# Altium PCB gecko3main-tester.PcbDoc
Units mm, origin at the board's own origin, x right, y up, seen from the top; angles counter-clockwise.
Board outline 134.62 x 99.31 mm, 2 copper layers (Top Layer, Bottom Layer), stack 1.671 mm thick; 38 components, 127 nets, 369 pads, 27 vias.
Unrouted connection lines stored in the file: 2.
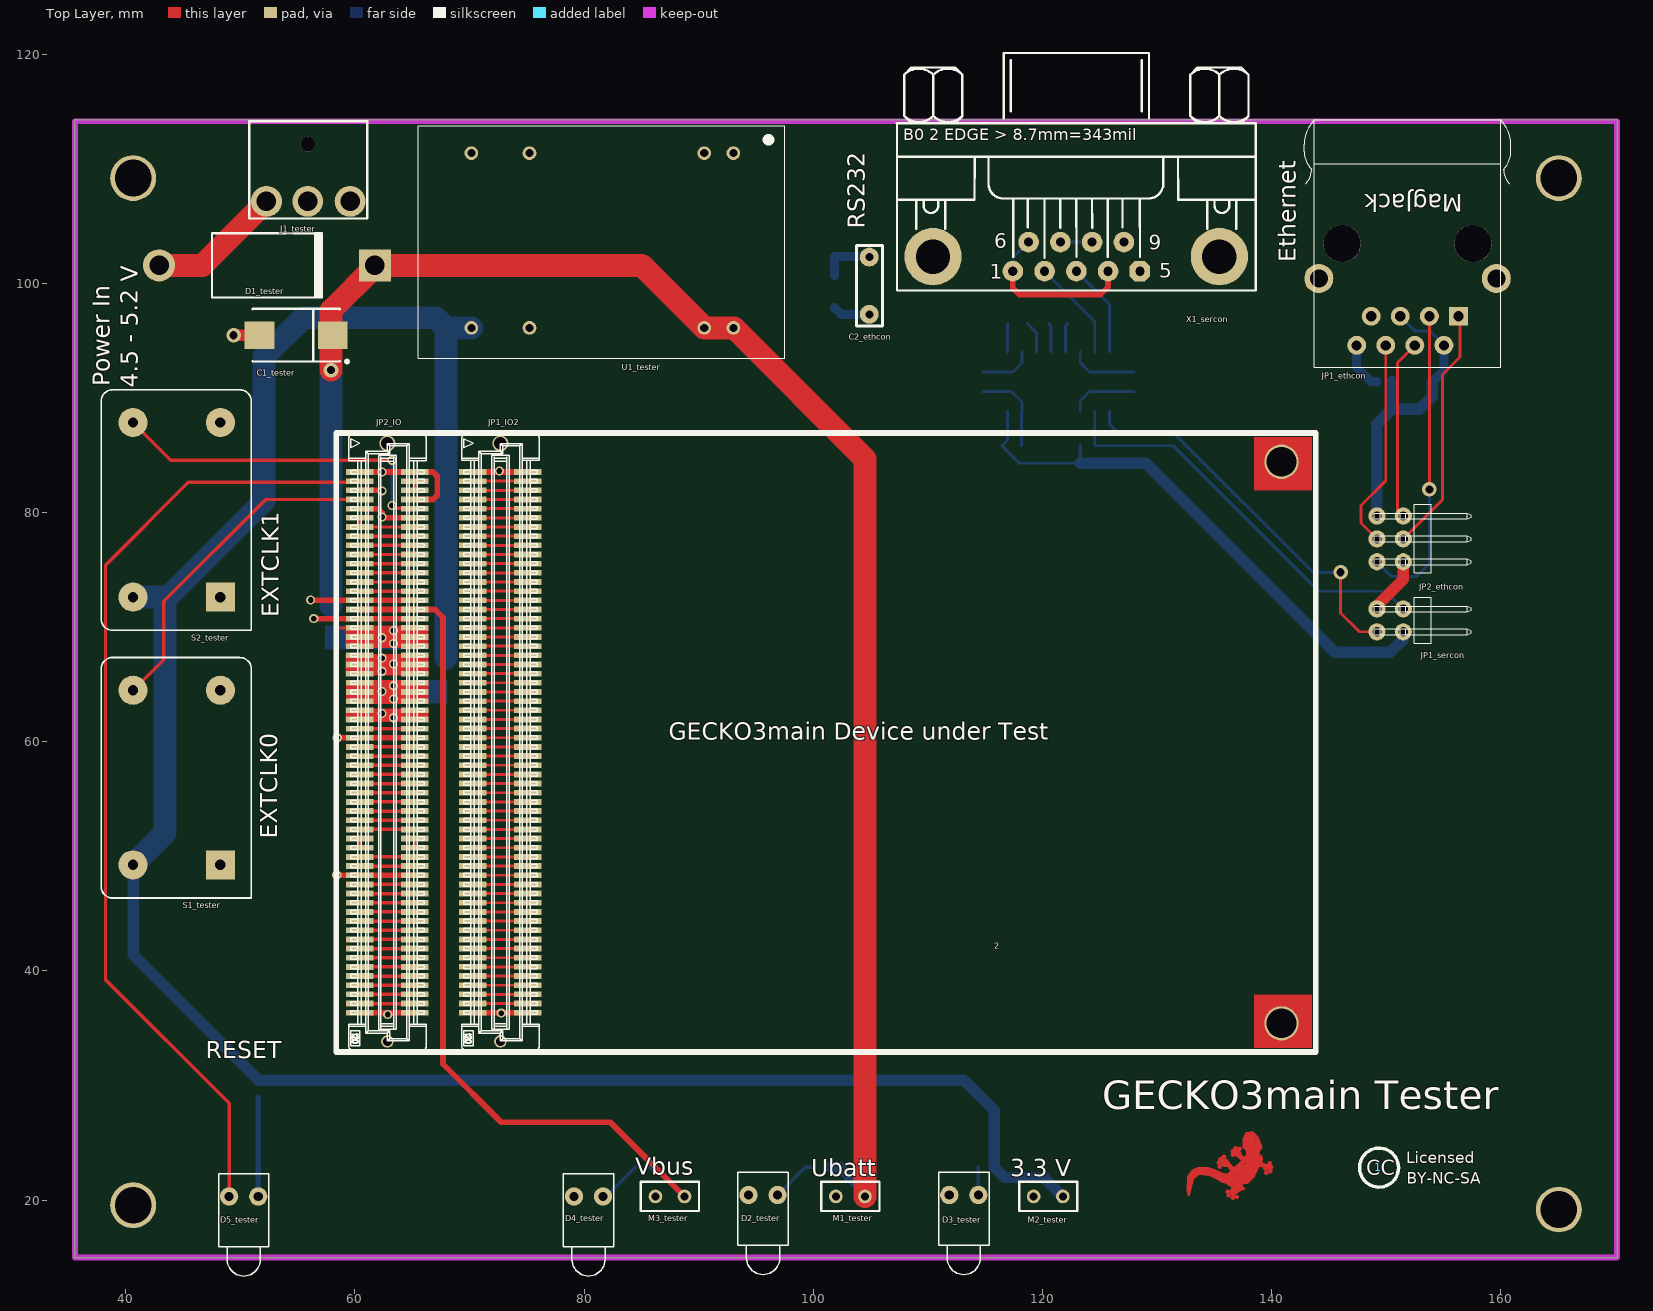
[diagram p0: Top Layer view]
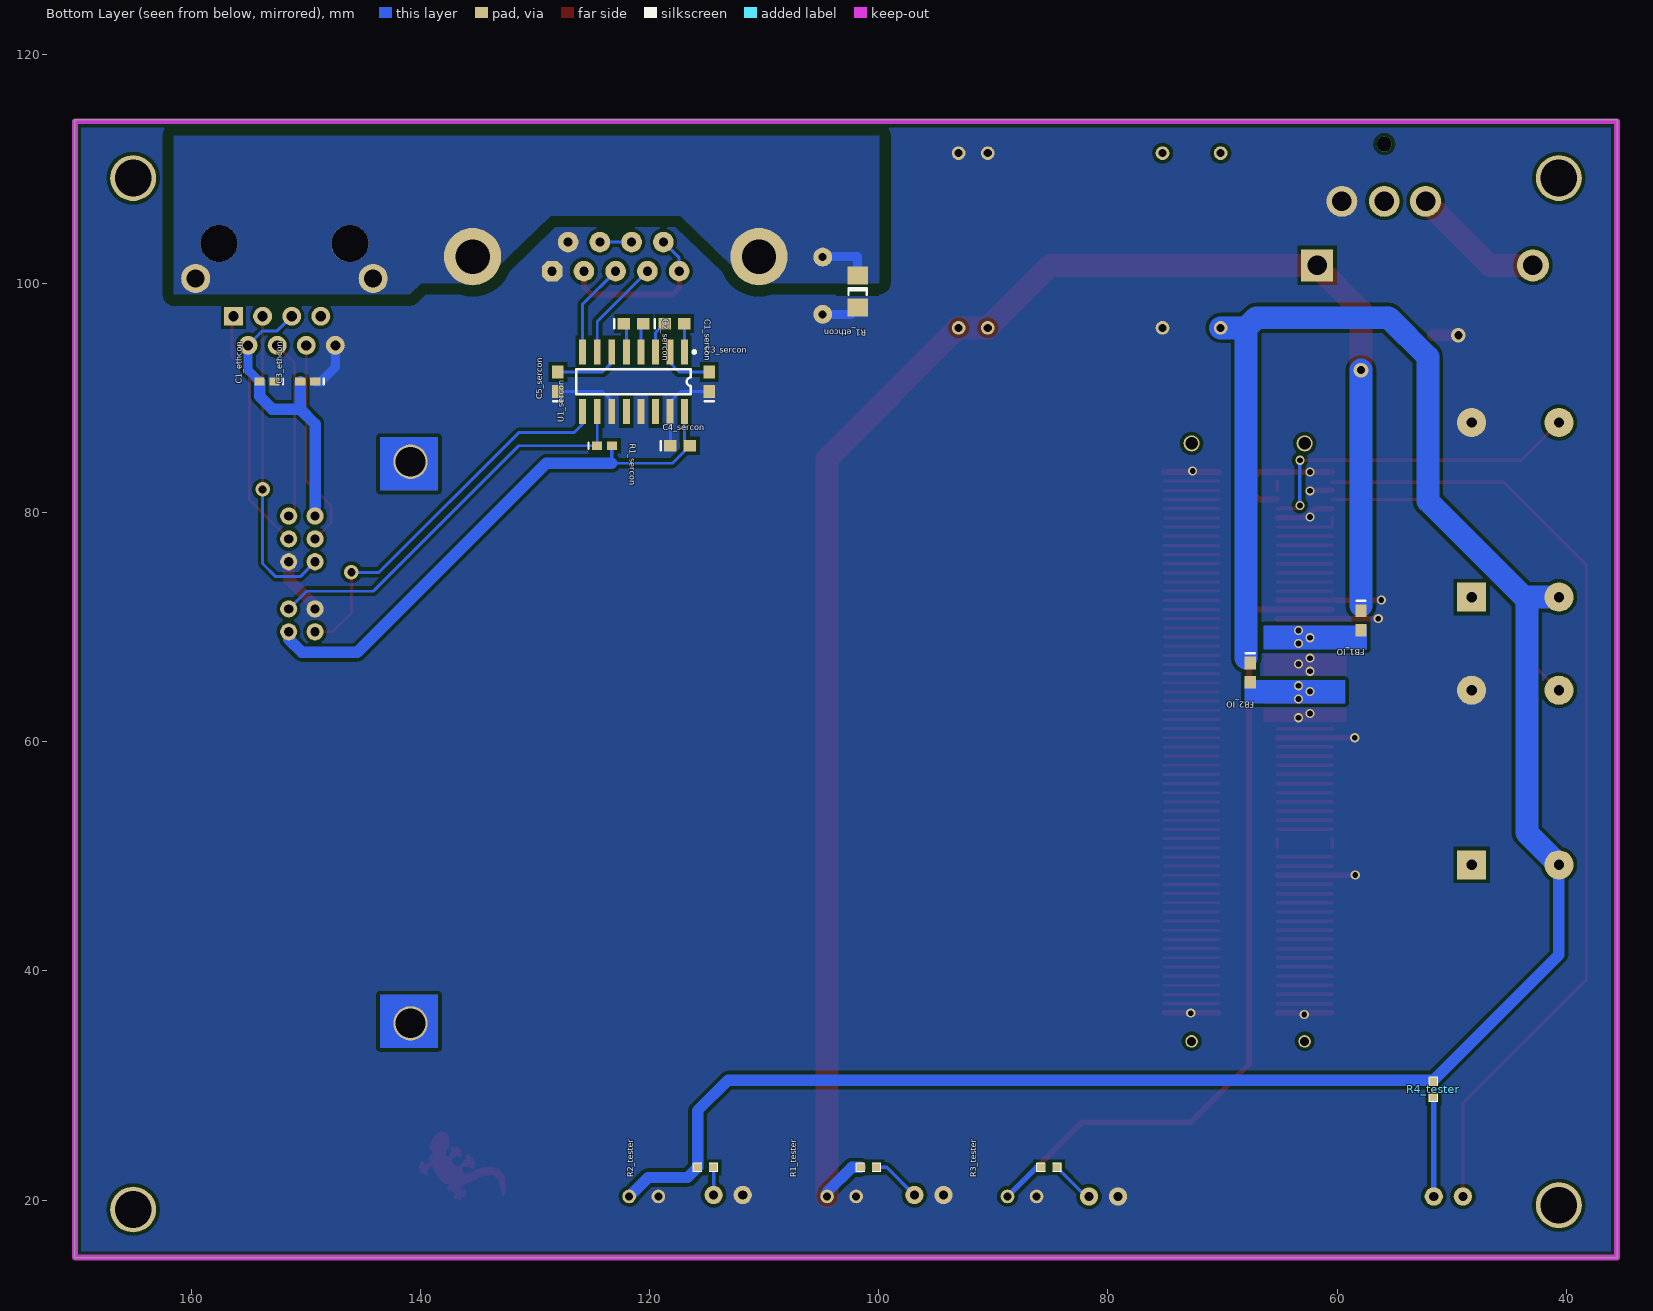
[diagram p1: Bottom Layer view, seen from below]

## Layer stack, top to bottom
Top Layer: signal copper 0.0356
Dielectric: core 1.6, FR-4, Dk 4.8
Bottom Layer: signal copper 0.0356

## Board outline
35.56,14.986 35.56,114.3 170.18,114.3 170.18,14.986

## Design rules (kind name [scope] priority, off if disabled: settings)
Clearance Clearance_earth [InNet('EARTH')] p1: gap=1
Clearance [All] p2: gap=0.3
ComponentClearance [All] p1: gap=0.254 collisioncheckmode=3 verticalgap=0.254
HoleSize [All] p1: absolutevalues=TRUE maxlimit=5 minlimit=0.025 maxpercent=80.000 minpercent=20.000
PolygonConnect [All] p1: connectstyle=Direct reliefconductorwidth=0.254 reliefentries=4 polygonreliefangle="90 Angle"
RoomDefinition gecko3main-tester [InComponentClass('gecko3main-tester')] p1: confinementstyle=ConfineIn formatcopy=TRUE lockcomponents=FALSE outline 132.334,19.685 160.02,19.685 160.02,26.289 132.334,26.289
RoomDefinition io-bus [InComponentClass('io-bus')] p2: confinementstyle=ConfineIn formatcopy=TRUE lockcomponents=FALSE outline 57.023,32.639 68.453,32.639 68.453,87.249 57.023,87.249
RoomDefinition tester [InComponentClass('tester')] p3: confinementstyle=ConfineIn formatcopy=TRUE lockcomponents=FALSE outline 37.465,12.954 123.444,12.954 123.444,114.554 37.465,114.554
RoomDefinition serial-con [InComponentClass('serial-con')] p4: confinementstyle=ConfineIn formatcopy=TRUE lockcomponents=FALSE outline 106.934,68.199 157.861,68.199 157.861,120.523 106.934,120.523
RoomDefinition ethernet-connector [InComponentClass('ethernet-connector')] p5: confinementstyle=ConfineIn formatcopy=TRUE lockcomponents=FALSE outline 100.584,74.422 161.29,74.422 161.29,114.681 100.584,114.681
RoomDefinition io-bus2 [InComponentClass('io-bus2')] p6: confinementstyle=ConfineIn formatcopy=TRUE lockcomponents=FALSE outline 68.786,32.697 68.786,87.371 76.614,87.371 76.614,32.697 76.214,32.697 76.214,32.547 69.186,32.547 69.186,32.697
RoutingVias [All] p1: holewidth=0.711 width=1.27 viastyle="Through Hole" minholewidth=0.5 minwidth=0.8 maxholewidth=5 maxwidth=7
SolderMaskExpansion [All] p1: expansion=0.102
TestPointUsage [All] p1: valid=0 allowmultiple=FALSE
Testpoint [All] p1: side=15 testpointundercomponent=TRUE minsize=1.016 maxsize=2.54 preferedsize=1.524 minholesize=0 maxholesize=1.016 preferedholesize=0.813 testpointgrid=0.025 style=1023 order=0-112345678
Width [All] p1: maxlimit=5 minlimit=0.254 preferedwidth=0.254 minimp=50.000000 maximp=50.000000 favimp=50.000000
17 further rules are at their usual default settings.

## Classes and differential pairs
component class tester: C1_tester D1_tester D2_tester D3_tester D4_tester D5_tester J1_tester M1_tester M2_tester M3_tester R1_tester R2_tester R3_tester R4_tester S1_tester S2_tester U1_tester
component class serial-con: 1_sercon C1_sercon C2_sercon C3_sercon C4_sercon C5_sercon JP1_sercon R1_sercon U1 U1_sercon X1 X1_sercon
component class io-bus: C2_IO FB1_IO FB2_IO JP1_IO JP2_IO R1_IO R2_IO
component class io-bus2: JP1_IO2 JP2_IO2
component class ethernet-connector: 1_ethcon C1_ethcon C2_ethcon C3_ethcon JP1_ethcon JP2_ethcon R1_ethcon
net class ENCODER[0..7]: ENCODER0 ENCODER1 ENCODER2 ENCODER3 ENCODER4 ENCODER5 ENCODER6 ENCODER7
net class GPIO1_[0..51]: GPIO1_1 GPIO1_4 GPIO1_6 GPIO1_8 GPIO1_10 GPIO1_12 GPIO1_14 GPIO1_16 GPIO1_18 GPIO1_19 GPIO1_21 GPIO1_23 GPIO1_25 GPIO1_27 GPIO1_29 GPIO1_31 GPIO1_33 GPIO1_35 GPIO1_37 GPIO1_39 GPIO1_41 GPIO1_43 GPIO1_45 GPIO1_47 GPIO1_49 GPIO1_51
net class GPIO2_[0..115]: GPIO2_1 GPIO2_3 GPIO2_5 GPIO2_7 GPIO2_9 GPIO2_11 GPIO2_13 GPIO2_15 GPIO2_17 GPIO2_19 GPIO2_21 GPIO2_23 GPIO2_25 GPIO2_27 GPIO2_29 GPIO2_31 GPIO2_33 GPIO2_35 GPIO2_37 GPIO2_39 GPIO2_41 GPIO2_43 GPIO2_45 GPIO2_47 GPIO2_49 GPIO2_51 GPIO2_53 GPIO2_55 GPIO2_57 GPIO2_59 GPIO2_61 GPIO2_63 GPIO2_65 GPIO2_67 GPIO2_69 GPIO2_71 GPIO2_73 GPIO2_75 GPIO2_77 GPIO2_79 GPIO2_81 GPIO2_83 GPIO2_85 GPIO2_87 GPIO2_89 GPIO2_91 GPIO2_93 GPIO2_95 GPIO2_97 GPIO2_99 GPIO2_101 GPIO2_103 GPIO2_105 GPIO2_107 GPIO2_109 GPIO2_111 GPIO2_113 GPIO2_115
component class gecko3main-tester: 1 2

## Components (designator, comment, footprint, x,y, rotation, side; value= is the part's Value field where it differs from the comment)
1 "CC License" CC-License 149.352,22.86 r0 top
2 "" GECKO3 137.16,22.352 r0 top
C1_ethcon "Cap" 0402 153.416,91.44 r0 bottom
C1_sercon "Cap" 0603#1 117.856,96.52 r180 bottom
C1_tester "Cap Pol3" D 54.864,95.504 r180 top
C2_ethcon "C" c-r5 104.902,99.822 r270 top
C2_sercon "Cap" 0603#1 121.412,96.52 r180 bottom
C3_ethcon "Cap" 0402 149.86,91.44 r0 bottom
C3_sercon "Cap" 0603#1 114.808,91.44 r90 bottom
C4_sercon "Cap" 0603#1 117.348,85.852 r180 bottom
C5_sercon "Cap" 0603#1 128.016,91.44 r90 bottom
D1_tester "Diode SB340" DO-201AD 52.324,101.6 r0 top
D2_tester "Green" LED-1 95.631,20.447 r270 top
D3_tester "Green" LED-1 113.157,20.447 r270 top
D4_tester "Green" LED-1 80.391,20.32 r270 top
D5_tester "Red" LED-1 50.292,20.32 r270 top
FB1_IO "FERRITE-BEAD" 0603#1 57.912,70.612 r270 bottom
FB2_IO "FERRITE-BEAD" 0603#1 67.564,66.04 r270 bottom
J1_tester "Mini Power Jack" "Mini power Jack" 55.88,107.188 r90 top
JP1_ethcon "SI-10021" SI-10021 151.892,99.06 r180 top
JP1_IO2 "AMP-FH-120-RECEPTABLE-H9-H13" amp_FH_.8mm_120pin_r_H9_H13 72.7,59.959 r270 top
JP1_sercon "M22-2040205" M22-2040205 150.368,70.612 r270 top
JP2_ethcon "M22-2540305" M22-2540305 150.368,77.724 r270 top
JP2_IO "AMP-FH-120-RECEPTABLE-H9-H13" amp_FH_.8mm_120pin_r_H9_H13 62.832,59.958 r270 top
M1_tester "Meter" RAD-0.1 103.251,20.32 r0 top
M2_tester "Meter" RAD-0.1 120.523,20.32 r0 top
M3_tester "Meter" RAD-0.1 87.503,20.32 r180 top
R1_ethcon "Res2" CC3216-1206 101.854,99.314 r270 bottom
R1_sercon "Res2" 0402 123.952,85.852 r180 bottom
R1_tester "Res2" 0603#2 100.203,22.86 r0 bottom
R2_tester "Res2" 0603#2 114.427,22.86 r0 bottom
R3_tester "Res2" 0603#2 84.455,22.86 r0 bottom
R4_tester "Res2" 0603#2 51.57,28.956 r90 bottom
S1_tester "#NAME?" IQXO-350 48.26,49.276 r180 top
S2_tester "#NAME?" IQXO-350 48.26,72.644 r180 top
U1_sercon "MAX3232CSE" SO-G16 121.412,91.44 r0 bottom
U1_tester "TRACO-TEL5" TRACO-TEL5 97.536,113.792 r0 top
X1_sercon "DB9/F" DSUB9RA/F 128.524,101.092 r0 top

## Footprints (in the part's own frame and the unit in brackets; to place one, negate y for a bottom-side part, rotate by r counter-clockwise, add the part's x,y. Pads: shape width x height; smd on the part's side, far side on the other; paste and mask are expansions set on the pad)
0402 [mm] "Chip Capacitor; Body 1.0 x 0.5 mm (LxW typ)"
  rect 0.9x0.7 smd: 1(-0.65,0) 2(0.65,0)
  silkscreen extent -1.4,-0.25 -1.4,0.25
0603#1 [mm] "Chip Capacitor; Body 1.6 x 0.8 mm (LxW typ)"
  rect 1.1x1 smd: 1(-0.85,0) 2(0.85,0)
  silkscreen extent -1.7,-0.4 -1.7,0.4
0603#2 [mm]
  rect 0.762x0.762 smd: 1(0.003,0.008) 2(1.4,0.008)
  silkscreen extent -0.37,-0.37 1.78,0.38
amp_FH_.8mm_120pin_r_H9_H13 [mm] "AMP Free Height System, 0.8mm, 120 Pin, 9 or 13mm Heigth, Receptacle"
  round 1.4 hole 1.1 paste-0.05 mask+0.06: 0(-26.1,0)
  round 1.1 hole 0.8 paste-0.05 mask+0.06: 0(26.1,0)
  rect 0.5x2.4 smd paste-0.05 mask+0.06: 1(-23.6,-2.4) 2(-23.6,2.4) 3(-22.8,-2.4) 4(-22.8,2.4) 5(-22,-2.4) 6(-22,2.4) 7(-21.2,-2.4) 8(-21.2,2.4) 9(-20.4,-2.4) 10(-20.4,2.4) 11(-19.6,-2.4) 12(-19.6,2.4) 13(-18.8,-2.4) 14(-18.8,2.4) 15(-18,-2.4) 16(-18,2.4) 17(-17.2,-2.4) 18(-17.2,2.4) 19(-16.4,-2.4) 20(-16.4,2.4) 21(-15.6,-2.4) 22(-15.6,2.4) 23(-14.8,-2.4) 24(-14.8,2.4) 25(-14,-2.4) 26(-14,2.4) 27(-13.2,-2.4) 28(-13.2,2.4) 29(-12.4,-2.4) 30(-12.4,2.4) 31(-11.6,-2.4) 32(-11.6,2.4) 33(-10.8,-2.4) 34(-10.8,2.4) 35(-10,-2.4) 36(-10,2.4) 37(-9.2,-2.4) 38(-9.2,2.4) 39(-8.4,-2.4) 40(-8.4,2.4) 41(-7.6,-2.4) 42(-7.6,2.4) 43(-6.8,-2.4) 44(-6.8,2.4) 45(-6,-2.4) 46(-6,2.4) 47(-5.2,-2.4) 48(-5.2,2.4) 49(-4.4,-2.4) 50(-4.4,2.4) 51(-3.6,-2.4) 52(-3.6,2.4) 53(-2.8,-2.4) 54(-2.8,2.4) 55(-2,-2.4) 56(-2,2.4) 57(-1.2,-2.4) 58(-1.2,2.4) 59(-0.4,-2.4) 60(-0.4,2.4) 61(0.4,-2.4) 62(0.4,2.4) 63(1.2,-2.4) 64(1.2,2.4) 65(2,-2.4) 66(2,2.4) 67(2.8,-2.4) 68(2.8,2.4) 69(3.6,-2.4) 70(3.6,2.4) 71(4.4,-2.4) 72(4.4,2.4) 73(5.2,-2.4) 74(5.2,2.4) 75(6,-2.4) 76(6,2.4) 77(6.8,-2.4) 78(6.8,2.4) 79(7.6,-2.4) 80(7.6,2.4) 81(8.4,-2.4) 82(8.4,2.4) 83(9.2,-2.4) 84(9.2,2.4) 85(10,-2.4) 86(10,2.4) 87(10.8,-2.4) 88(10.8,2.4) 89(11.6,-2.4) 90(11.6,2.4) 91(12.4,-2.4) 92(12.4,2.4) 93(13.2,-2.4) 94(13.2,2.4) 95(14,-2.4) 96(14,2.4) 97(14.8,-2.4) 98(14.8,2.4) 99(15.6,-2.4) 100(15.6,2.4) 101(16.4,-2.4) 102(16.4,2.4) 103(17.2,-2.4) 104(17.2,2.4) 105(18,-2.4) 106(18,2.4) 107(18.8,-2.4) 108(18.8,2.4) 109(19.6,-2.4) 110(19.6,2.4) 111(20.4,-2.4) 112(20.4,2.4) 113(21.2,-2.4) 114(21.2,2.4) 115(22,-2.4) 116(22,2.4) 117(22.8,-2.4) 118(22.8,2.4) 119(23.6,-2.4) 120(23.6,2.4)
  silkscreen extent -26.91,-3.39 26.89,3.41
c-r5 [mil] "Condensator spacing 5mm"
  round 65 hole 27.56: 1(-98.43,0) 2(98.43,0)
  silkscreen extent -138,-44 138,45
CC3216-1206 [mm] "Chip Capacitor; Body 3.2 x 1.6 mm (LxW typ)"
  rect 1.6x1.8 smd: 1(-1.4,0) 2(1.4,0)
  silkscreen extent -0.3,-0.8 0.3,0.8
CC-License [mm]
  silkscreen extent -1.65,-1.73 1.75,1.68
D [mm] "Capacitor, SM Tantalum; Body 7.3 x 4.3 mm (LxW typ)"
  rect 2.6x2.4 smd: 1(-3.2,0) 2(3.2,0)
  silkscreen extent -4.58,-2.3 3.8,2.42
DO-201AD [mm] "Diode, Axial; Body 9.5 x 5.6 mm (LxDia. max), Lead Dia. 1.32 mm (max)"
  round 2.8 hole 1.7: 1(-9.42,0)
  rect 2.8x2.8 hole 1.7: 2(9.42,0)
  silkscreen extent -4.8,-2.8 4.9,2.8
DSUB9RA/F [mm] "DB9 female connector"
  round 1.8 hole 0.8: 1(-11.091,0) 2(-8.318,0) 3(-5.546,0) 4(-2.773,0) 6(-9.715,2.54) 7(-6.943,2.54) 8(-4.17,2.54) 9(-1.397,2.54)
  oct 1.8x1.8 hole 0.8: 5(0,0)
  round 5 hole 3: ""(-18.055,1.27) ""(6.943,1.27)
  silkscreen extent -21.21,-1.69 10.12,19.05
GECKO3 [mm] "Gecko Logo"
  Top Layer lines w0.254: -4.293,-0.418 -4.293,-0.457 -4.275,-0.9 ; -3.773,0.102 -2.464,0.102 ; -2.134,-0.025 -2.261,0.102 -2.464,0.102 ; -2.083,-0.025 -1.829,-0.025 -1.422,-0.432 ; -1.778,-0.102 -1.778,-0.025 ; -1.524,-0.203 -1.905,-0.203 -2.337,-0.203 ; -1.443,0.895 -0.935,0.895 -0.858,0.818 -0.741,0.667 -0.752,0.647 -1.036,0.666 -1.341,0.666 -1.443,0.768 -1.443,0.996 -1.316,1.123 -1.098,1.123 -0.938,0.963 ; -1.422,-0.686 -1.422,-0.076 ; -1.422,-0.381 -1.473,-0.432 -1.93,-0.432 ; -1.42,-0.101 -0.666,-0.151 ; -1.295,-0.584 -1.295,-0.15 ; -1.17,-0.127 -1.17,-0.635 -1.041,-0.838 -0.666,-0.151 ; -0.995,-0.685 -0.995,-0.177 ; -0.85,0.625 -0.743,0.392 -0.633,0.309 ; -0.838,-0.66 -0.888,-0.076 -0.393,0.418 ; -0.735,0.665 -0.448,0.377 ; -0.6,0.45 -0.588,0.447 ; -0.584,-0.66 -0.356,-0.889 0,-0.889 0.025,-0.864 0.025,-0.838 0.152,-0.711 0.61,-0.711 1.245,-0.001 1.245,0.255 1.778,0.713 ; -0.584,0 -0.584,-0.203 -0.152,0.229 0.178,0.229 0.229,0.178 0.276,0.225 0.479,0.225 0.94,0.686 ; -0.562,0.495 -0.526,0.284 ; -0.508,0.102 -0.279,0.102 -0.305,0.127 ; -0.441,0.291 0.333,1.065 ; -0.381,-1.6 -0.381,-1.549 -0.152,-1.321 ; -0.381,-1.118 0.127,-1.118 -0.076,-1.321 -0.152,-1.321 ; -0.347,0.426 -0.305,0.254 ; -0.3,0.457 0.406,0.457 ; -0.233,0.513 -0.152,0.457 0.025,0.457 0.508,0.94 0.508,1.143 ; -0.215,0.432 -0.666,-0.151 ; -0.175,1.55 -0.149,1.526 ; -0.102,1.499 -0.229,1.626 -0.229,1.829 -0.152,1.905 -0.102,1.905 -0.07,1.841 -0.041,1.857 -0.02,1.815 -0.075,1.65 ; -0.03,1.835 0.06,1.805 ; -0.016,1.461 0.109,1.345 0.097,1.347 0.179,1.271 ; 0.003,1.768 0.069,1.714 0.1,1.651 ; 0.067,1.811 0.104,1.724 0.075,1.65 ; 0.1,1.6 0.303,1.397 0.506,1.322 0.785,1.551 0.735,1.854 0.685,2.09 0.432,2.268 0.432,2.692 0.432,2.997 0.686,3.48 1.168,3.556 1.651,3.073 1.93,2.235 1.861,2.095 1.815,2.08 1.706,1.861 1.696,1.841 1.626,1.701 1.93,1.448 2.007,1.219 1.899,0.896 1.904,0.89 2.261,0.711 2.361,0.611 ; 0.178,0.457 0.178,0.432 0.813,0.432 ; 0.2,1.25 0.325,1.125 0.323,1.125 0.406,1.041 0.508,1.143 ; 0.25,1.25 0.222,1.311 0.254,1.397 ; 0.254,1.27 0.33,1.346 0.406,1.27 0.461,1.325 1.075,1.325 1.075,2.506 1.067,2.515 ; 0.33,-0.432 -0.279,-0.432 -0.076,-0.229 0.825,-0.229 ; 0.508,1.168 0.508,1.143 ; 0.635,-0.229 0.432,-0.432 0.432,-0.457 0.178,-0.711 0.178,-1.321 -0.025,-1.524 ; 0.686,0.432 0.94,0.686 ; 0.737,0.787 0.737,2.032 0.635,2.134 0.635,3.073 0.889,3.327 1.067,3.327 ; 0.889,3.023 0.991,3.023 ; 0.991,0.635 1.321,0.635 ; 0.996,3.129 0.838,2.972 0.838,2.261 0.94,2.159 0.94,0.686 ; 1.067,3.099 1.067,3.327 ; 1.125,0.675 1.125,1.856 ; 1.194,0.508 1.067,0.508 0.686,0.127 0.686,0 ; 1.219,2.515 1.067,2.515 ; 1.524,2.489 1.524,0.737 1.016,0.229 1.016,0 0.356,-0.66 -0.254,-0.66 -0.381,-0.533 -0.381,-0.33 -0.051,0 0.686,0 ; 1.702,2.235 1.626,2.311 1.626,2.769 1.067,3.327 ; 1.702,2.475 1.702,2.032 1.524,1.854 1.524,1.626 1.524,1.499 1.778,1.245 ; 2.261,0.508 1.778,0.711 1.575,0.356 1.273,-0.295 0.737,-0.801 0.33,-0.914 0.203,-1.041 0.203,-1.118 0.432,-1.346 -0.025,-1.524 ; 2.275,0.522 2.294,0.542 2.304,0.542 2.314,0.532 2.323,0.542 2.333,0.542 2.333,0.581 2.353,0.6 ; 2.337,0.584 2.337,0.635 ; -2.464,0.102 -2.667,0.305 -3.531,0.305 -3.327,0.102 -2.667,0.102 -2.54,-0.025 -1.778,-0.025 ; -2.337,-0.203 -2.743,-0.102 -3.48,-0.025 -4.039,-0.508 -4.369,-1.88 -4.42,-1.473 -4.394,-0.33 -4.013,0.203 -3.556,0.432 -3.302,0.457 -2.667,0.432 -2.134,0.229 -1.422,-0.076 ; -2.337,-0.203 -1.93,-0.432 ; -1.93,-0.432 -1.448,-0.711 -0.991,-0.889 -0.483,-1.245 -0.152,-1.092 -0.533,-1.346 -0.686,-1.549 -0.61,-1.829 ; -1.778,-0.025 -1.422,-0.076 ; -0.61,-1.829 -0.61,-1.778 -0.152,-1.321 ; -0.61,-1.829 -0.33,-1.829 -0.025,-1.524 ; 0.686,0 1.321,0.635 ; 1.067,2.515 0.838,2.743 1.247,2.743 1.321,2.669 1.321,0.635
  Top Layer lines w0.3: -0.838,-0.66 -0.381,-1.118 ; -0.584,-0.66 -0.584,-0.1 ; 0.406,0.457 0.737,0.787 ; 0.991,3.023 1.524,2.489 ; 1.778,0.713 1.778,1.245
  Top Layer lines w0.34: 2.15,0.675 2.5,0.65 ; 2.217,0.526 2.325,0.4 ; 2.336,0.375 2.4,0.375 2.475,0.45 ; 2.475,0.4 2.5,0.5 2.5,0.625
  Top Layer lines w0.381: -1.775,0.9 -1.75,0.9 ; -1.675,0.55 -1.65,0.55 ; -1.625,1.225 -1.6,1.225 ; -1.3,1.425 -1.275,1.425 ; -0.991,-1.626 -0.966,-1.626 ; -0.889,-1.956 -0.864,-1.956 ; -0.533,-2.134 -0.508,-2.134 ; -0.525,1.6 -0.5,1.6 ; -0.525,1.925 -0.5,1.925 ; -0.3,2.175 -0.275,2.175 ; -0.177,-2.082 -0.152,-2.082 ; 0.075,2.125 0.1,2.125 ; 2.375,0.05 2.4,0.05 ; 2.7,0.85 2.725,0.85 ; 2.725,0.175 2.75,0.175 ; 2.825,0.5 2.85,0.5
  Top Layer lines w0.4: -4.293,-0.418 -3.773,0.102
IQXO-350 [mm]
  rect 2.54x2.54 hole 0.9: 1(0.006,0.008)
  round 2.54 hole 0.9: 7(0.006,-15.232) 8(7.626,-15.232) 14(7.626,0.008)
  silkscreen extent -2.69,-18.1 10.41,2.91
LED-1 [mm] "Typical RED GaAs LED; 2 Leads"
  round 1.6 hole 0.8: 1(0,1.27) 2(0,-1.27)
  silkscreen extent -2,-2.2 6.95,2.2
M22-2040205 [mm] "Harwin 2mm horizontal connector 2x2 pin"
  round 1.5 hole 0.8: 1(-1,-1.15) 2(-1,1.15) 3(1,-1.15) 4(1,1.15)
  silkscreen extent -2,-1.38 2,7.1
M22-2540305 [mm] "Harwin 2mm horizontal connector 2x3 pin"
  round 1.5 hole 0.8: 1(-2,-1.15) 2(-2,1.15) 3(0,-1.15) 4(0,1.15) 5(2,-1.15) 6(2,1.15)
  silkscreen extent -3,-1.38 2.98,7.1
"Mini power Jack" [mm] "J"
  round 2.7 hole 1.7: 1(0,3.6) 2(0,0) 3(0,-3.7)
  round 1.3 hole 1.3: ""(5,0)
  silkscreen extent -1.5,-5.2 7,5.1
RAD-0.1 [mm] "Indicating Instrument; 2 Leads"
  round 1.2 hole 0.7: 1(-1.27,0) 2(1.27,0)
  silkscreen extent -2.54,-1.27 2.54,1.27
SI-10021 [mil] "MagJack from Bel Stewart, single port RJ45 with magnetics, without LED's"
  round 127.99 hole 127.99: 0(-225,-175) 0(225,-175)
  rect 65x65 hole 35: 1(-175,75)
  round 65 hole 35: 2(-125,175) 3(-75,75) 4(-25,175) 5(25,75) 6(75,175) 7(125,75) 8(175,175)
  round 100 hole 62: s(-305,-55) s(305,-55)
  silkscreen extent -355,-600 355,250
SO-G16 [mm] "Small Outline; 16 Leads; Body Width 3.9 mm; Pitch 1.27 mm"
  rect 0.6x2.2 smd: 1(-4.445,-2.6) 2(-3.175,-2.6) 3(-1.905,-2.6) 4(-0.635,-2.6) 5(0.635,-2.6) 6(1.905,-2.6) 7(3.175,-2.6) 8(4.445,-2.6) 9(4.445,2.6) 10(3.175,2.6) 11(1.905,2.6) 12(0.635,2.6) 13(-0.635,2.6) 14(-1.905,2.6) 15(-3.175,2.6) 16(-4.445,2.6)
  silkscreen extent -5.42,-2.72 5,1.1
TRACO-TEL5 [mm] "DC/DC Converter Serie TEL5 from Traco Power"
  round 1.2 hole 0.7: 2(-4.5,-2.4) 3(-7.04,-2.4) 9(-22.3,-2.4) 11(-27.375,-2.4) 14(-27.375,-17.65) 16(-22.3,-17.65) 22(-7.04,-17.65) 23(-4.5,-17.65)
  silkscreen extent -32,-20.3 0,0

## Part data
2: library part Gecko3, "GECKO3"
C1_ethcon C1_sercon C2_sercon C3_ethcon C3_sercon C4_sercon C5_sercon: "Capacitor"
C1_tester: "Polarized Capacitor (Surface Mount)"
D1_tester: library part "Diode 1N4001", "1 Amp General Purpose Rectifier"
D2_tester D3_tester D4_tester D5_tester: library part LED1, "Typical RED GaAs LED"
J1_tester: library part "MINI POWER JACK"
JP1_ethcon: "MagJack from Bel Stewart, single port RJ45 with magnetics, without LED's"
JP1_IO2 JP2_IO: "AMP Free Height System, 0.8mm, 120 Pin, 9 or 13mm Height, Receptable"
M1_tester M2_tester M3_tester: "Indicating Instrument"
R1_ethcon R1_sercon R1_tester R2_tester R3_tester R4_tester: "Resistor"
S1_tester S2_tester: library part IQXO-350, "Crystal Oscillator"
U1_sercon: "3.0V TO 5.5V, Low-Power, up to 1Mbps, True RS-232 Transceiver Using Four 0.1µF External Capacitor"
U1_tester: "TRACO DC/DC Converter TEL5 Series"

## Free pads (board coordinates)
  round 4 hole 3.2: 0(40.64,109.22) 1(40.64,19.558) 2(165.1,19.177) 3(165.1,109.22)
  round 3 hole 2.6 paste-0.05 mask+0.06: 0(140.882,84.458) 0(140.882,35.433)

## Via types
v1: diameter 0.8, hole 0.5, Top Layer to Bottom Layer, 23 vias
v2: diameter 1.27, hole 0.711, Top Layer to Bottom Layer, 4 vias

## Nets (pads, with @x,y where several pads share a name; then routed paths per layer and width w, separated by ;. In a path a pad name is that pad's centre, name@x,y a point inside that pad or via, vN(x,y) a via of type N, cw(c..) or ccw(c..) an arc to the next point about the centre after c; other vN are vias at no path point)
3.3V: C1_ethcon.2 C3_ethcon.2 C4_sercon.2 FB2_IO.1 JP1_ethcon.2 JP1_ethcon.5 JP1_sercon.4 JP2_ethcon.1 M2_tester.2 R1_sercon.2 R2_tester.2 R4_tester.2 S1_tester.14 S2_tester.14 U1_sercon.16 U1_tester.14 | length 275.4
  Bottom Layer w0.254: U1_sercon.16 116.967,86.321 C4_sercon.2 118.022,84.328 123.317,84.328 ; JP1_ethcon.5 152.527,95.885 153.797,95.885 JP1_ethcon.2
  Bottom Layer w0.3: R1_sercon.2 123.317,85.837 123.317,84.328
  Bottom Layer w0.8: C1_ethcon.2 155.067,92.441 JP1_ethcon.2
  Bottom Layer w1: S1_tester.14 40.634,41.408 51.562,30.48 113.157,30.48 115.824,27.813 115.824,23.495 ; 115.827,23.492 R2_tester.2 116.709,21.971 120.142,21.971 M2_tester.2 ; 123.317,84.328 129.032,84.328 145.542,67.818 150.368,67.818 151.518,68.968 JP1_sercon.4 ; JP2_ethcon.1 149.218,87.75 150.51,89.042 ; C3_ethcon.2 150.51,89.042 ; C1_ethcon.2 154.066,90.17 152.938,89.042 150.51,89.042
  Bottom Layer w2: S1_tester.14 43.434,52.068 43.434,72.644 40.642,72.644 S2_tester.14 ; 43.688,72.644 52.07,81.026 52.07,93.599 55.499,97.028 67.056,97.028 67.942,96.142 U1_tester.14 ; FB2_IO.1@67.945,67.31 67.945,96.142
EARTH: C2_ethcon.1 JP1_ethcon.0 JP1_ethcon.s R1_ethcon.1 X1_sercon. | length 4.7
  Bottom Layer w0.8: R1_ethcon.1 101.854,102.362 104.902,102.362 C2_ethcon.1
ENCODER0: JP2_IO.61 JP2_IO.62 | length 4.8
  Top Layer w0.3: JP2_IO.61 JP2_IO.62
ENCODER1: JP2_IO.63 JP2_IO.64 | length 4.8
  Top Layer w0.3: JP2_IO.63 JP2_IO.64
ENCODER2: JP2_IO.65 JP2_IO.66 | length 4.8
  Top Layer w0.3: JP2_IO.65 JP2_IO.66
ENCODER3: JP2_IO.67 JP2_IO.68 | length 4.8
  Top Layer w0.3: JP2_IO.67 JP2_IO.68
ENCODER4: JP2_IO.69 JP2_IO.70 | length 4.8
  Top Layer w0.3: JP2_IO.69 JP2_IO.70
ENCODER5: JP2_IO.71 JP2_IO.72 | length 4.8
  Top Layer w0.3: JP2_IO.71 JP2_IO.72
ENCODER6: JP2_IO.73 JP2_IO.74 | length 4.8
  Top Layer w0.3: JP2_IO.73 JP2_IO.74
ENCODER7: JP2_IO.75 JP2_IO.76 | length 4.8
  Top Layer w0.3: JP2_IO.75 JP2_IO.76
EXTCLK0: JP2_IO.7 S1_tester.8 | length 29.7
  Top Layer w0.3: S1_tester.8 43.307,67.181 43.307,72.263 52.202,81.158 JP2_IO.7
EXTCLK1: JP2_IO.10 S2_tester.8 | length 30
  Top Layer w0.3: S2_tester.8 43.928,84.582 v1(63.246,84.582) ; v1(63.246,80.645) 63.5,80.391 65.199,80.391 JP2_IO.10
  Bottom Layer w0.3: v1(63.246,80.645) v1(63.246,84.582)
GND: C1_ethcon.1 C1_tester.2 C2_ethcon.2 C3_ethcon.1 C3_sercon.1 C4_sercon.1 C5_sercon.1 D2_tester.2 D3_tester.2 D4_tester.2 J1_tester.3 JP1_ethcon.8 JP1_IO2.1 JP1_IO2.2 JP1_IO2.119 JP1_IO2.120 JP1_sercon.1 JP2_ethcon.6 JP2_IO.1 JP2_IO.2 JP2_IO.5 JP2_IO.8 JP2_IO.9 JP2_IO.12 JP2_IO.29 JP2_IO.30 JP2_IO.33 JP2_IO.34 JP2_IO.41 JP2_IO.42 JP2_IO.43 JP2_IO.44 JP2_IO.45 JP2_IO.46 JP2_IO.53 JP2_IO.54 JP2_IO.55 JP2_IO.56 JP2_IO.59 JP2_IO.60 JP2_IO.89 JP2_IO.90 JP2_IO.119 JP2_IO.120 M1_tester.1 M2_tester.1 M3_tester.2 R1_ethcon.2 S1_tester.7 S2_tester.7 U1_sercon.11 U1_sercon.13 U1_sercon.15 U1_tester.2 U1_tester.3 U1_tester.16 X1_sercon.5 X1_sercon.9 | length 92.9
  Top Layer w0.5: v1@56.134,72.358 JP2_IO.30 ; v1@56.388,70.739 v1(56.407,70.758) JP2_IO.34 ; v1(58.42,48.387) 58.449,48.358 JP2_IO.90 ; v1@58.42,60.325 v1(58.453,60.358) JP2_IO.60 ; JP2_IO.119 62.829,36.358 v1(62.865,36.195) 62.901,36.358 JP2_IO.120 ; JP2_IO.9 62.009,80.358 62.357,80.01 v1(62.357,79.629) 62.428,79.558 JP2_IO.12 ; JP2_IO.5 v1@62.314,81.958 ; JP2_IO.1 66.81,83.558 67.183,83.185 67.183,81.534 66.807,81.158 JP2_IO.8 ; JP1_IO2.1 72.51,83.559 v1(72.608,83.657) ; JP1_IO2.119@70.338,36.358 72.735,36.358 v1(72.771,36.322) 72.807,36.358 JP1_IO2.120@75.138,36.358 ; v1@72.68,83.53 v1(72.608,83.657) ; JP1_IO2.2 72.706,83.559 v1(72.608,83.657)
  Top Layer w1: v2(49.403,95.504) C1_tester.2 ; JP1_sercon.1 149.218,71.875 151.518,74.175 JP2_ethcon.6
  Bottom Layer w0.254: C3_sercon.1 117.309,90.59 118.237,89.662 U1_sercon.15 118.198,88.801 C4_sercon.1 ; U1_sercon.11 123.317,89.789 124.118,90.59 C5_sercon.1
  Bottom Layer w0.8: R1_ethcon.2 102.446,97.322 C2_ethcon.2 ; JP1_ethcon.8 147.447,92.71 148.717,91.44 C3_ethcon.1
  other v1: 63.373,62.103 62.357,62.484 62.357,66.167 63.373,66.802 62.357,67.31 56.134,72.39 62.357,81.915 62.357,83.558
GPIO1_1: JP2_IO.4 JP2_IO.6 | length 0.8
  Top Layer w0.3: JP2_IO.6 JP2_IO.4
GPIO1_4: JP2_IO.11 JP2_IO.13 JP2_IO.14 | length 5.6
  Top Layer w0.3: JP2_IO.11 JP2_IO.13 JP2_IO.14
GPIO1_6: JP2_IO.15 JP2_IO.16 | length 4.8
  Top Layer w0.3: JP2_IO.15 JP2_IO.16
GPIO1_8: JP2_IO.17 JP2_IO.18 | length 4.8
  Top Layer w0.3: JP2_IO.17 JP2_IO.18
GPIO1_10: JP2_IO.19 JP2_IO.20 | length 4.8
  Top Layer w0.3: JP2_IO.19 JP2_IO.20
GPIO1_12: JP2_IO.21 JP2_IO.22 | length 4.8
  Top Layer w0.3: JP2_IO.21 JP2_IO.22
GPIO1_14: JP2_IO.23 JP2_IO.24 | length 4.8
  Top Layer w0.3: JP2_IO.23 JP2_IO.24
GPIO1_16: JP2_IO.25 JP2_IO.26 | length 4.8
  Top Layer w0.3: JP2_IO.25 JP2_IO.26
GPIO1_18: JP2_IO.27 JP2_IO.28 | length 4.8
  Top Layer w0.3: JP2_IO.27 JP2_IO.28
GPIO1_19: JP2_IO.82 JP2_IO.84 | length 0.8
  Top Layer w0.3: JP2_IO.84 JP2_IO.82
GPIO1_21: JP2_IO.85 JP2_IO.86 | length 4.8
  Top Layer w0.3: JP2_IO.85 JP2_IO.86
GPIO1_23: JP2_IO.87 JP2_IO.88 | length 4.8
  Top Layer w0.3: JP2_IO.87 JP2_IO.88
GPIO1_25: JP2_IO.91 JP2_IO.92 | length 4.8
  Top Layer w0.3: JP2_IO.91 JP2_IO.92
GPIO1_27: JP2_IO.93 JP2_IO.94 | length 4.8
  Top Layer w0.3: JP2_IO.93 JP2_IO.94
GPIO1_29: JP2_IO.95 JP2_IO.96 | length 4.8
  Top Layer w0.3: JP2_IO.95 JP2_IO.96
GPIO1_31: JP2_IO.97 JP2_IO.98 | length 4.8
  Top Layer w0.3: JP2_IO.97 JP2_IO.98
GPIO1_33: JP2_IO.99 JP2_IO.100 | length 4.8
  Top Layer w0.3: JP2_IO.99 JP2_IO.100
GPIO1_35: JP2_IO.101 JP2_IO.102 | length 4.8
  Top Layer w0.3: JP2_IO.101 JP2_IO.102
GPIO1_37: JP2_IO.103 JP2_IO.104 | length 4.8
  Top Layer w0.3: JP2_IO.103 JP2_IO.104
GPIO1_39: JP2_IO.105 JP2_IO.106 | length 4.8
  Top Layer w0.3: JP2_IO.105 JP2_IO.106
GPIO1_41: JP2_IO.107 JP2_IO.108 | length 4.8
  Top Layer w0.3: JP2_IO.107 JP2_IO.108
GPIO1_43: JP2_IO.109 JP2_IO.110 | length 4.8
  Top Layer w0.3: JP2_IO.109 JP2_IO.110
GPIO1_45: JP2_IO.111 JP2_IO.112 | length 4.8
  Top Layer w0.3: JP2_IO.111 JP2_IO.112
GPIO1_47: JP2_IO.113 JP2_IO.114 | length 4.8
  Top Layer w0.3: JP2_IO.113 JP2_IO.114
GPIO1_49: JP2_IO.115 JP2_IO.116 | length 4.8
  Top Layer w0.3: JP2_IO.115 JP2_IO.116
GPIO1_51: JP2_IO.117 JP2_IO.118 | length 4.8
  Top Layer w0.3: JP2_IO.117 JP2_IO.118
GPIO2_1: JP1_IO2.3 JP1_IO2.4 | length 4.8
  Top Layer w0.254: JP1_IO2.3 JP1_IO2.4
GPIO2_3: JP1_IO2.5 JP1_IO2.6 | length 4.8
  Top Layer w0.254: JP1_IO2.5 JP1_IO2.6
GPIO2_5: JP1_IO2.7 JP1_IO2.8 | length 4.8
  Top Layer w0.254: JP1_IO2.7 JP1_IO2.8
GPIO2_7: JP1_IO2.9 JP1_IO2.10 | length 4.8
  Top Layer w0.254: JP1_IO2.9 JP1_IO2.10
GPIO2_9: JP1_IO2.11 JP1_IO2.12 | length 4.8
  Top Layer w0.254: JP1_IO2.11 JP1_IO2.12
GPIO2_11: JP1_IO2.13 JP1_IO2.14 | length 4.8
  Top Layer w0.254: JP1_IO2.13 JP1_IO2.14
GPIO2_13: JP1_IO2.15 JP1_IO2.16 | length 4.8
  Top Layer w0.254: JP1_IO2.15 JP1_IO2.16
GPIO2_15: JP1_IO2.17 JP1_IO2.18 | length 4.8
  Top Layer w0.254: JP1_IO2.17 JP1_IO2.18
GPIO2_17: JP1_IO2.19 JP1_IO2.20 | length 4.8
  Top Layer w0.254: JP1_IO2.19 JP1_IO2.20
GPIO2_19: JP1_IO2.21 JP1_IO2.22 | length 4.8
  Top Layer w0.254: JP1_IO2.21 JP1_IO2.22
GPIO2_21: JP1_IO2.23 JP1_IO2.24 | length 4.8
  Top Layer w0.254: JP1_IO2.23 JP1_IO2.24
GPIO2_23: JP1_IO2.25 JP1_IO2.26 | length 4.8
  Top Layer w0.254: JP1_IO2.25 JP1_IO2.26
GPIO2_25: JP1_IO2.27 JP1_IO2.28 | length 4.8
  Top Layer w0.254: JP1_IO2.27 JP1_IO2.28
GPIO2_27: JP1_IO2.29 JP1_IO2.30 | length 4.8
  Top Layer w0.254: JP1_IO2.29 JP1_IO2.30
GPIO2_29: JP1_IO2.31 JP1_IO2.32 | length 4.8
  Top Layer w0.254: JP1_IO2.31 JP1_IO2.32
GPIO2_31: JP1_IO2.33 JP1_IO2.34 | length 4.8
  Top Layer w0.254: JP1_IO2.33 JP1_IO2.34
GPIO2_33: JP1_IO2.35 JP1_IO2.36 | length 4.8
  Top Layer w0.254: JP1_IO2.35 JP1_IO2.36
GPIO2_35: JP1_IO2.37 JP1_IO2.38 | length 4.8
  Top Layer w0.254: JP1_IO2.37 JP1_IO2.38
GPIO2_37: JP1_IO2.39 JP1_IO2.40 | length 4.8
  Top Layer w0.254: JP1_IO2.39 JP1_IO2.40
GPIO2_39: JP1_IO2.41 JP1_IO2.42 | length 4.8
  Top Layer w0.254: JP1_IO2.41 JP1_IO2.42
GPIO2_41: JP1_IO2.43 JP1_IO2.44 | length 4.8
  Top Layer w0.254: JP1_IO2.43 JP1_IO2.44
GPIO2_43: JP1_IO2.45 JP1_IO2.46 | length 4.8
  Top Layer w0.254: JP1_IO2.45 JP1_IO2.46
GPIO2_45: JP1_IO2.47 JP1_IO2.48 | length 4.8
  Top Layer w0.254: JP1_IO2.47 JP1_IO2.48
GPIO2_47: JP1_IO2.49 JP1_IO2.50 | length 4.8
  Top Layer w0.254: JP1_IO2.49 JP1_IO2.50
GPIO2_49: JP1_IO2.51 JP1_IO2.52 | length 4.8
  Top Layer w0.254: JP1_IO2.51 JP1_IO2.52
GPIO2_51: JP1_IO2.53 JP1_IO2.54 | length 4.8
  Top Layer w0.254: JP1_IO2.53 JP1_IO2.54
GPIO2_53: JP1_IO2.55 JP1_IO2.56 | length 4.8
  Top Layer w0.254: JP1_IO2.55 JP1_IO2.56
GPIO2_55: JP1_IO2.57 JP1_IO2.58 | length 4.8
  Top Layer w0.254: JP1_IO2.57 71.255,61.159 JP1_IO2.58
GPIO2_57: JP1_IO2.59 JP1_IO2.60 | length 4.8
  Top Layer w0.254: JP1_IO2.59 JP1_IO2.60
GPIO2_59: JP1_IO2.61 JP1_IO2.62 | length 4.8
  Top Layer w0.254: JP1_IO2.61 JP1_IO2.62
GPIO2_61: JP1_IO2.63 JP1_IO2.64 | length 4.8
  Top Layer w0.254: JP1_IO2.63 JP1_IO2.64
GPIO2_63: JP1_IO2.65 JP1_IO2.66 | length 4.8
  Top Layer w0.254: JP1_IO2.65 JP1_IO2.66
GPIO2_65: JP1_IO2.67 JP1_IO2.68 | length 4.8
  Top Layer w0.254: JP1_IO2.67 JP1_IO2.68
GPIO2_67: JP1_IO2.69 JP1_IO2.70 | length 4.8
  Top Layer w0.254: JP1_IO2.69 JP1_IO2.70
GPIO2_69: JP1_IO2.71 JP1_IO2.72 | length 4.8
  Top Layer w0.254: JP1_IO2.71 JP1_IO2.72
GPIO2_71: JP1_IO2.73 JP1_IO2.74 | length 4.8
  Top Layer w0.254: JP1_IO2.73 JP1_IO2.74
GPIO2_73: JP1_IO2.75 JP1_IO2.76 | length 4.8
  Top Layer w0.254: JP1_IO2.75 JP1_IO2.76
GPIO2_75: JP1_IO2.77 JP1_IO2.78 | length 4.8
  Top Layer w0.254: JP1_IO2.77 JP1_IO2.78
GPIO2_77: JP1_IO2.79 JP1_IO2.80 | length 4.8
  Top Layer w0.254: JP1_IO2.79 JP1_IO2.80
GPIO2_79: JP1_IO2.81 JP1_IO2.82 | length 4.8
  Top Layer w0.254: JP1_IO2.81 JP1_IO2.82
GPIO2_81: JP1_IO2.83 JP1_IO2.84 | length 4.8
  Top Layer w0.254: JP1_IO2.83 JP1_IO2.84
GPIO2_83: JP1_IO2.85 JP1_IO2.86 | length 4.8
  Top Layer w0.254: JP1_IO2.85 JP1_IO2.86
GPIO2_85: JP1_IO2.87 JP1_IO2.88 | length 4.8
  Top Layer w0.254: JP1_IO2.87 JP1_IO2.88
GPIO2_87: JP1_IO2.89 JP1_IO2.90 | length 4.8
  Top Layer w0.254: JP1_IO2.89 JP1_IO2.90
GPIO2_89: JP1_IO2.91 JP1_IO2.92 | length 4.8
  Top Layer w0.254: JP1_IO2.91 JP1_IO2.92
GPIO2_91: JP1_IO2.93 JP1_IO2.94 | length 4.8
  Top Layer w0.254: JP1_IO2.93 JP1_IO2.94
GPIO2_93: JP1_IO2.95 JP1_IO2.96 | length 4.8
  Top Layer w0.254: JP1_IO2.95 JP1_IO2.96
GPIO2_95: JP1_IO2.97 JP1_IO2.98 | length 4.8
  Top Layer w0.254: JP1_IO2.97 JP1_IO2.98
GPIO2_97: JP1_IO2.99 JP1_IO2.100 | length 4.8
  Top Layer w0.254: JP1_IO2.99 JP1_IO2.100
GPIO2_99: JP1_IO2.101 JP1_IO2.102 | length 4.8
  Top Layer w0.254: JP1_IO2.101 JP1_IO2.102
GPIO2_101: JP1_IO2.103 JP1_IO2.104 | length 4.8
  Top Layer w0.254: JP1_IO2.103 JP1_IO2.104
GPIO2_103: JP1_IO2.105 JP1_IO2.106 | length 4.8
  Top Layer w0.254: JP1_IO2.105 JP1_IO2.106
GPIO2_105: JP1_IO2.107 JP1_IO2.108 | length 4.8
  Top Layer w0.254: JP1_IO2.107 JP1_IO2.108
GPIO2_107: JP1_IO2.109 JP1_IO2.110 | length 4.8
  Top Layer w0.254: JP1_IO2.109 JP1_IO2.110
GPIO2_109: JP1_IO2.111 JP1_IO2.112 | length 4.8
  Top Layer w0.254: JP1_IO2.111 JP1_IO2.112
GPIO2_111: JP1_IO2.113 JP1_IO2.114 | length 4.8
  Top Layer w0.254: JP1_IO2.113 JP1_IO2.114
GPIO2_113: JP1_IO2.115 JP1_IO2.116 | length 4.8
  Top Layer w0.254: JP1_IO2.115 JP1_IO2.116
GPIO2_115: JP1_IO2.117 JP1_IO2.118 | length 4.8
  Top Layer w0.254: JP1_IO2.117 JP1_IO2.118
LINESENSORIN1: JP2_IO.77 JP2_IO.78 | length 4.8
  Top Layer w0.3: JP2_IO.77 JP2_IO.78
LINESENSORIN2: JP2_IO.79 JP2_IO.80 | length 4.8
  Top Layer w0.3: JP2_IO.79 JP2_IO.80
"LOW BATTERY": JP2_IO.57 JP2_IO.58 | length 4.8
  Top Layer w0.3: JP2_IO.57 JP2_IO.58
NetC1_sercon_1: C1_sercon.1 U1_sercon.3 | length 2.8
  Bottom Layer w0.254: C1_sercon.1 119.507,95.719 U1_sercon.3
NetC1_sercon_2: C1_sercon.2 U1_sercon.1 | length 2.5
  Bottom Layer w0.254: U1_sercon.1 116.967,96.481 C1_sercon.2
NetC2_sercon_1: C2_sercon.1 U1_sercon.5 | length 2.6
  Bottom Layer w0.254: U1_sercon.5 122.047,96.305 C2_sercon.1
NetC2_sercon_2: C2_sercon.2 U1_sercon.4 | length 2.6
  Bottom Layer w0.254: C2_sercon.2 120.777,96.305 U1_sercon.4
NetC3_sercon_2: C3_sercon.2 U1_sercon.2 | length 4.7
  Bottom Layer w0.254: C3_sercon.2 117.436,92.29 118.237,93.091 U1_sercon.2
NetC5_sercon_2: C5_sercon.2 U1_sercon.6 | length 6
  Bottom Layer w0.254: U1_sercon.6 123.317,93.091 124.118,92.29 C5_sercon.2
NetD1_tester_1: D1_tester.1 J1_tester.1 | length 11.7
  Top Layer w2: D1_tester.1 46.692,101.6 J1_tester.1
NetD2_tester_1: D2_tester.1 R1_tester.1 | length 4.3
  Bottom Layer w0.3: D2_tester.1 99.306,22.852 R1_tester.1
NetD3_tester_1: D3_tester.1 R2_tester.1 | length 2.4
  Bottom Layer w0.3: D3_tester.1 114.43,20.45 R2_tester.1
NetD4_tester_1: D4_tester.1 R3_tester.1 | length 3.8
  Bottom Layer w0.3: D4_tester.1 81.926,20.32 R3_tester.1
NetD5_tester_1: D5_tester.1 R4_tester.1 | length 8.7
  Bottom Layer w0.5: D5_tester.1 D5_tester.1@51.57,20.328 ; D5_tester.1@51.57,20.32 R4_tester.1@51.57,28.959
NetFB1_IO_2: FB1_IO.2 JP2_IO.35 JP2_IO.36 JP2_IO.37 JP2_IO.38 JP2_IO.39 JP2_IO.40 | length 2
  Top Layer w0.254: 58.464,69.958 JP2_IO.35
  other v1: 63.373,68.58 62.357,69.088 63.373,69.723
NetFB2_IO_2: FB2_IO.2 JP2_IO.47 JP2_IO.48 JP2_IO.49 JP2_IO.50 JP2_IO.51 JP2_IO.52 | length 5.6
  Top Layer w0.254: JP2_IO.47 JP2_IO.48
  Bottom Layer w0.254: 67.564,64.414 FB2_IO.2
  other v1: 63.373,63.754 62.357,64.389 63.373,64.897
NetU1_sercon_7: U1_sercon.7 X1_sercon.2 | length 8.9
  Bottom Layer w0.254: X1_sercon.2 124.587,96.711 U1_sercon.7
NetU1_sercon_8: U1_sercon.8 X1_sercon.3 | length 8.2
  Bottom Layer w0.254: X1_sercon.3 125.857,98.213 U1_sercon.8
NetX1_sercon_1: X1_sercon.1 X1_sercon.4 X1_sercon.6 | length 14.8
  Top Layer w0.5: X1_sercon.1 117.433,99.61 117.983,99.06 125.095,99.06 125.751,99.716 X1_sercon.4
  Bottom Layer w0.254: X1_sercon.1 117.433,102.256 X1_sercon.6
NetX1_sercon_7: X1_sercon.7 X1_sercon.8 | length 2.8
  Bottom Layer w0.254: X1_sercon.7@121.59,103.632 X1_sercon.8@124.358,103.632
RD+: JP1_ethcon.1 JP2_ethcon.4 | length 21.5
  Top Layer w0.254: JP2_ethcon.4 154.94,81.146 154.94,92.075 156.464,93.599 156.464,97.028 JP1_ethcon.1
RD-: JP1_ethcon.3 JP2_ethcon.5 | length 27.2
  Top Layer w0.254: v2(153.797,82.042) JP1_ethcon.3
  Bottom Layer w0.254: JP2_ethcon.5 150.52,74.422 152.654,74.422 153.797,75.565 v2(153.797,82.042)
RESET: D5_tester.2 JP2_IO.3 | length 84.8
  Top Layer w0.3: D5_tester.2 49.022,28.448 38.227,39.243 38.227,75.438 45.466,82.677 JP2_IO.3@60.452,82.677
SCL_EXT: JP2_IO.81 JP2_IO.83 | length 0.8
  Top Layer w0.3: JP2_IO.83 JP2_IO.81
"SERIAL IN": JP1_sercon.3 U1_sercon.9 | length 34
  Top Layer w0.254: v2(146.05,74.803) 146.05,71.247 147.685,69.612 JP1_sercon.3
  Bottom Layer w0.254: U1_sercon.9 125.857,87.757 126.619,86.995 131.445,86.995 143.637,74.803 v2(146.05,74.803)
"SERIAL OUT": JP1_sercon.2 R1_sercon.1 U1_sercon.10 | length 35.8
  Bottom Layer w0.254: U1_sercon.10 124.587,85.867 R1_sercon.1 131.445,85.852 144.145,73.152 149.978,73.152 JP1_sercon.2
TD+: JP1_ethcon.4 JP2_ethcon.2 | length 15.7
  Top Layer w0.254: JP2_ethcon.2 151.003,80.239 151.003,93.091 JP1_ethcon.4
TD-: JP1_ethcon.6 JP2_ethcon.3 | length 18.4
  Top Layer w0.254: JP2_ethcon.3 147.828,79.114 147.828,80.645 149.987,82.804 JP1_ethcon.6
UBATT: C1_tester.1 D1_tester.2 FB1_IO.1 M1_tester.2 R1_tester.2 U1_tester.22 U1_tester.23 | length 149.6
  Top Layer w2: v2(57.912,92.456) 57.912,97.663 61.849,101.6 85.038,101.6 U1_tester.22 93.091,96.142 104.521,84.712 M1_tester.2
  Bottom Layer w1: R1_tester.2 102.37,22.852 104.521,20.701 M1_tester.2
  Bottom Layer w2: FB1_IO.1@57.912,71.882 v2(57.912,92.456)
VBUS: JP2_IO.31 JP2_IO.32 M3_tester.1 R3_tester.2 | length 76.4
  Top Layer w0.5: JP2_IO.31 66.999,71.558 67.691,70.866 67.691,31.877 72.771,26.797 82.296,26.797 M3_tester.1
  Bottom Layer w0.5: R3_tester.2 86.241,22.852 M3_tester.1
pads on no net: J1_tester. J1_tester.2 JP1_ethcon.7 JP1_IO2.0 JP2_IO.0 S1_tester.1 S2_tester.1 U1_sercon.12 U1_sercon.14 U1_tester.9 U1_tester.11

## Polygon pours and split planes (outlines as drawn)
EARTH on Bottom Layer "Bottom Layer-EARTH" (solid, remove dead copper, pour order 1000): 99.949,113.919 99.949,99.92 100.076,100.042 111.252,100.042 117.348,105.937 128.651,105.937 134.747,100.042 139.954,100.042 140.97,99.06 161.544,99.06 161.544,113.919
GND on Bottom Layer "Bottom Layer-GND" (solid, remove dead copper, pour order 1001): 35.56,114.3 35.56,15.24 169.926,15.24 169.926,114.3 169.672,114.017 35.56,114.017

## Keep-outs
Keep-Out Layer:
  lines w0.5: 35.56,14.986 170.18,14.986 170.18,114.173 35.56,114.173 35.56,14.986

## Other copper
Top Layer:
  rectangle net NetFB2_IO_2: 59.232,63.308 66.432,65.405
  rectangle net NetFB1_IO_2: 59.182,68.199 66.432,70.172
  rectangle: 138.482,33.258 143.557,37.933
  rectangle: 138.482,81.933 143.557,86.608
  rectangle net GND: 59.182,65.786 66.432,67.691
  rectangle net GND: 59.182,61.722 66.432,62.936
Bottom Layer:
  rectangle net NetFB2_IO_2: 59.309,63.373 68.072,65.405
  region: 143.557,37.933 138.482,37.933 138.482,33.258 143.557,33.258
  region: 143.557,86.608 138.482,86.608 138.482,81.933 143.557,81.933
  rectangle net NetFB1_IO_2: 57.404,68.072 66.421,70.172

## Silkscreen, mask and mechanical layers (free items; w line width, h text height)
Top Overlay:
  lines w0.5: 143.882,32.933 143.882,86.958 58.382,86.958 58.382,32.933 143.882,32.933
  text "RS232" at 104.521,104.775 h1.5 r90
  text "Ethernet" at 142.113,101.854 h1.5 r90
  text "Power In" at 38.608,91.059 h1.5 r90
  text "4.5 - 5.2 V" at 41.021,90.932 h1.5 r90
  text "EXTCLK1" at 53.34,70.866 h1.5 r90
  text "GECKO3main Device under Test" at 87.376,60.198 h1.5
  text "EXTCLK0" at 53.213,51.562 h1.5 r90
  text "RESET" at 46.99,32.385 h1.5
  text "GECKO3main Tester" at 125.222,27.94 h2.5
  text "Vbus" at 84.455,22.225 h1.5
  text "Ubatt" at 99.822,22.098 h1.5
  text "3.3 V" at 117.221,22.098 h1.5
Mechanical 1:
  the board outline again, w0.1

## Text inside footprints (layer, text, board x,y; h text height)
1: Top Overlay "CC" at 148.302,22.185 h1.3; Top Overlay "BY-NC-SA" at 151.802,21.41 h1; Top Overlay "Licensed" at 151.777,23.235 h1
JP1_ethcon: Top Overlay "MagJack" at 156.718,107.823 h1.52 r180
X1_sercon: Top Overlay "6" at 115.824,103.073 h1.27; Top Overlay "1" at 115.418,100.432 h1.27; Top Overlay "5" at 130.226,100.533 h1.27; Top Overlay "9" at 129.311,102.972 h1.27; Top Overlay "B0 2 EDGE > 8.7mm=343mil" at 107.848,112.522 h1.02